# EAGLE board Smartglove_IMU_FIX_Connections (EAGLE 9.2.0)
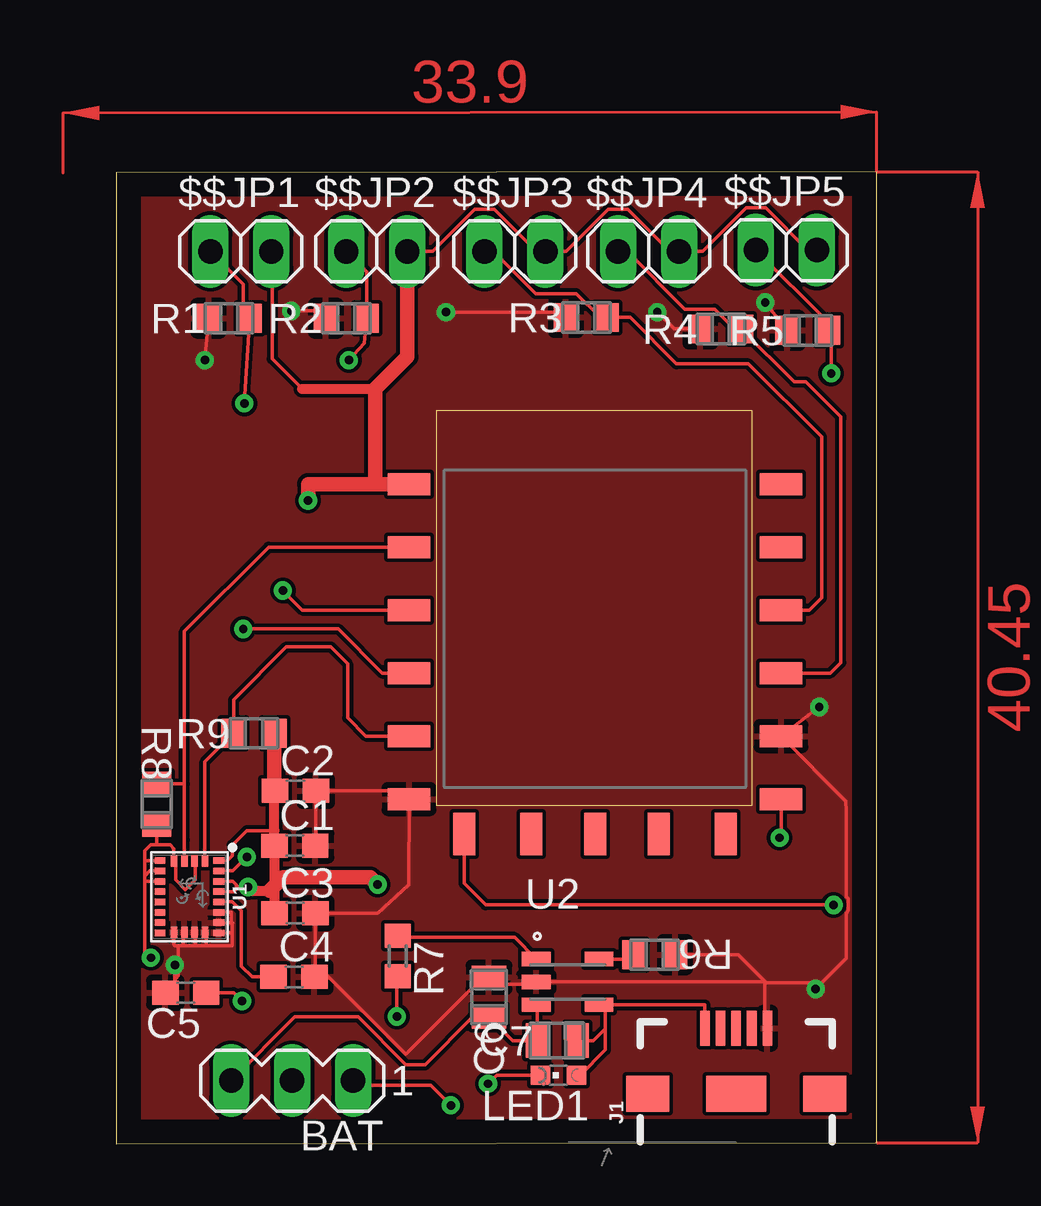
[diagram p0: board, top side]
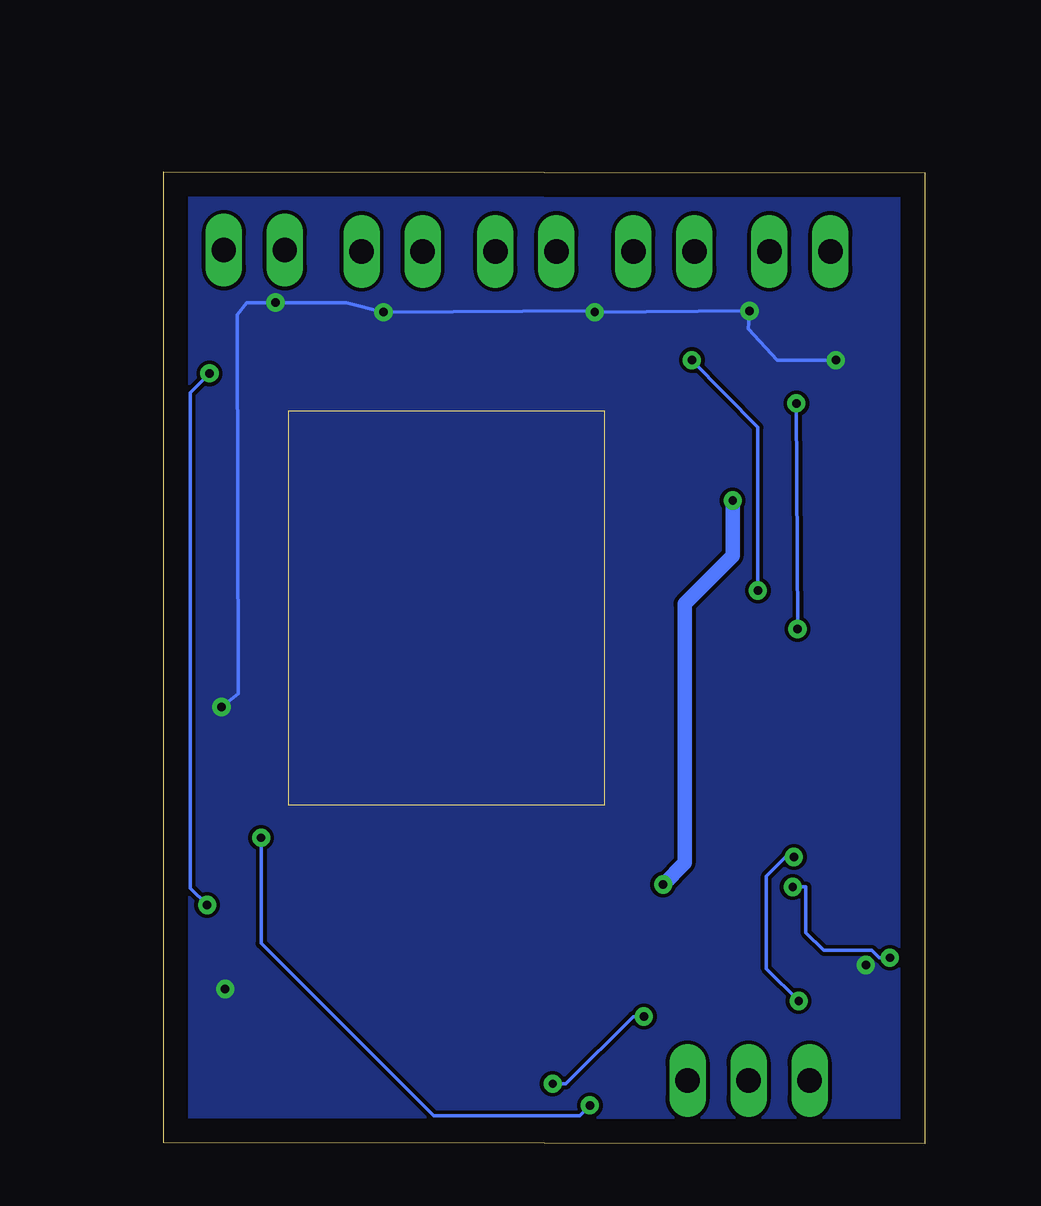
[diagram p1: board, bottom side, seen from below]

Size 31.7 x 40.5 mm. Coordinates in mm from the lower left corner, seen from the top.
Outline: 0,0 31.7,0.05 31.7,40.5 0,40.45 0,0
Copper layers (1*16): Top 0.035mm / dielectric 1.5mm / Bottom 0.035mm
Design rules "default": minimum track width 6mil, minimum drill 0.35mm, track to track 6mil, track to pad 6mil, pad to pad 6mil, via to via 6mil, smd to smd 6mil, copper to edge 40mil, drill to drill 6mil, minimum pad ring 10mil, minimum via ring 8mil, stop-mask expansion 4mil, vias tented up to drill 0mil, thermal gap 10mil
Milling: area 13.3,14.1 to 26.5,30.5

## Footprints (pad centres in the part's own frame; a part is rotated, then mirrored left to right if it is on the bottom)
1X02 = drill 1.016 long: 1 -1.27,0; 2 1.27,0
MA03-1 = drill 1.016 long: 1 -2.54,0; 2 0,0; 3 2.54,0
C0603 = smd 1.1 x 1: 1 -0.85,0; 2 0.85,0
YAG_CC0805 = smd 0.965 x 1.448: 1 -0.826,0; 2 0.826,0
USB-B-MICRO-SMD = smd 1.45 x 0.4: D+ 2.725,0; D- 2.725,0.65; GND 2.725,-1.3; ID 2.725,-0.65; VBUS 2.725,1.3 | smd 1.5 x 1.8: SHIELD1 0,3.685; SHIELD2 0,-3.685 | smd 1.5 x 2.5: SHIELD3 0,0
CHIPLED_0603 = smd 0.8 x 0.8: A 0,-0.75; C 0,0.75
RC0805N = smd 1.006 x 1.2: 1 -0.853,0; 2 0.853,0
R0603 = smd 1 x 1.1: 1 -0.85,0; 2 0.85,0
LGA-24-3.5X3 = smd 0.27 x 0.45: 1 -1.505,1.225; 6 -1.505,-1.225; 7 -1.075,-1.225; 8 -0.645,-1.225; 9 -0.215,-1.225; 10 0.215,-1.225; 11 0.645,-1.225; 12 1.075,-1.225; 13 1.505,-1.225; 18 1.505,1.225; 19 1.075,1.225; 20 0.645,1.225; 21 0.215,1.225; 22 -0.215,1.225; 23 -0.645,1.225; 24 -1.075,1.225 | smd 0.45 x 0.27: 2 -1.475,0.645; 3 -1.475,0.215; 4 -1.475,-0.215; 5 -1.475,-0.645; 14 1.475,-0.645; 15 1.475,-0.215; 16 1.475,0.215; 17 1.475,0.645
SOT23-5 = smd 1.2 x 0.6: 1 -1.306,0.95; 2 -1.306,0; 3 -1.306,-0.95; 4 1.306,-0.95; 5 1.306,0.95
BLE-NANO-PKG = smd 1.778 x 0.914: A3 7.75,4.375; A4 7.75,1.75; GND$6 -7.75,-3.5; GND$8 7.75,-0.875; RXD -7.75,1.75; SCL -7.75,-0.875; SDA -7.75,7; SWCLK 7.75,9.625; SWDIO 7.75,7; TXD -7.75,4.375; VDD -7.75,9.625; VIN 7.75,-3.5 | smd 0.914 x 1.778: P06 2.65,-4.95; P07 5.45,-4.95; P15 0,-4.95; P28 -5.45,-4.95; P29 -2.65,-4.95

## Placement (x,y rotation side)
$$JP1  [1X02]  5.2,37.18 0 top
$$JP2  [1X02]  10.87,37.18 0 top
$$JP3  [1X02]  16.62,37.18 0 top
$$JP4  [1X02]  22.19,37.18 0 top
$$JP5  [1X02]  27.94,37.24 0 top
BAT  [MA03-1]  7.34,2.63 180 top
C1  10u  [C0603]  7.45,12.42 0 top
C2  .1u  [C0603]  7.48,14.7 0 top
C3  .1u  [C0603]  7.46,9.61 0 top
C4  10n  [C0603]  7.42,6.95 0 top
C5  0.1u  [C0603]  2.91,6.3 180 top
C6  CC0805ZRY5V6BB475  [YAG_CC0805]  15.54,6.11 90 top
C7  CC0805ZRY5V6BB475  [YAG_CC0805]  18.38,4.3 0 top
J1  [USB-B-MICRO-SMD]  25.84,2.09 90 top
LED1  [CHIPLED_0603]  18.44,2.86 90 top
R1  ERJ-6GEYJ203V  [RC0805N]  4.71,34.4 0 top
R2  ERJ-6GEYJ203V  [RC0805N]  9.6,34.4 0 top
R3  ERJ-6GEYJ203V  [RC0805N]  19.6,34.43 0 top
R4  ERJ-6GEYJ203V  [RC0805N]  25.2,33.95 0 top
R5  ERJ-6GEYJ203V  [RC0805N]  28.83,33.89 0 top
R6  ERJ-6GEYJ203V  [RC0805N]  22.44,7.88 180 top
R7  [R0603]  11.74,7.82 270 top
R8  ERJ-6GEYJ203V  [RC0805N]  1.7,14.15 270 top
R9  ERJ-6GEYJ203V  [RC0805N]  5.75,17.1 0 top
U1  LSM9DS1  [LGA-24-3.5X3]  3.06,10.29 270 top
U2  MCP73832T-2ACI/OT  [SOT23-5]  18.82,6.74 0 top
U$1  BLE-NANO  [BLE-NANO-PKG]  19.96,17.86 0 top

## Library data of the parts
$$JP1-$$JP5 = pinhead
BAT = con-lstb; OC_FARNELL: unknown; OC_NEWARK: unknown
C1-C5 = rcl; SPICEPREFIX: C
C6 C7 = Yageo 4.7uF Cap; MANUFACTURER_PART_NUMBER: CC0805ZRY5V6BB475; VENDOR: Yageo
J1 = SparkFun-Connectors; PROD_ID: CONN-11752
LED1 = led
R1-R6 R8 R9 = Panasonic 20K Res; MANUFACTURER_PART_NUMBER: ERJ6GEYJ203V; VENDOR: Panasonic
R7 = rcl; SPICEPREFIX: R
U1 = SparkFun-Sensors; PROD_ID: IC-12536
U2 = MCP73832T-2ACI_OT; AVAILABILITY: Unavailable; MF: Microchip; MP: MCP73832T-2ACI-OT; PACKAGE: SOT-23-5 Microchip; PRICE: None
U$1 = BLE-NANO

## Nets
AN1: $$JP5.1 R5.2 U$1.P28
AN2: $$JP2.1 R2.2 U$1.TXD
AN3: $$JP1.1 R1.2 U$1.RXD
AN4: $$JP4.1 R4.2 U$1.A4
AN5: $$JP3.1 R3.2 U$1.A3
GND: C1.2 C2.2 C3.2 C4.2 C5.2 C6.2 J1.GND R1.1 R2.1 R3.1 R4.1 R5.1 R6.1 U1.14 U1.15 U1.16 U1.17 U1.18 U1.19 U1.20 U2.2 U$1.GND$6 U$1.GND$8
N$5: C5.1 U1.24
N$6: C4.1 U1.21
N$8: LED1.C R7.2
N$9: R7.1 U2.1
N$16: R6.2 U2.5
SCL: R9.1 U1.2 U$1.SCL
SDA: R8.1 U1.4 U$1.SDA
VBAT: BAT.3 C6.1 C7.1 U2.3
VBUS: C7.2 J1.VBUS LED1.A U2.4
VDD: $$JP1.2 $$JP2.2 $$JP3.2 $$JP4.2 $$JP5.2 C1.1 C2.1 C3.1 R8.2 R9.2 U1.1 U1.3 U1.5 U1.6 U1.7 U1.8 U1.22 U1.23 U$1.VDD
VIN: BAT.1 U$1.VIN

## Tracks (layer width: path | path; a pad name or v marks a point on that pad's centre or on a via)
AN1  (via drill 0.35 pad 0.55)
  Top 0.152: v29.9,9.95 15.4,9.95 14.5,10.85 14.51,10.86 U$1.P28 | $$JP5.1 29.68,34.22 R5.2 29.8,33.77 v29.8,32.1
  Bottom 0.152: v29.9,9.95 30.6,10.65 30.6,31.3 v29.8,32.1
AN2  (via drill 0.35, 0.35 pad 0.55)
  Top 0.152: v6.95,23.05 7.77,22.23 U$1.TXD | v9.7,32.65 10.35,33.35 R2.2 10.45,36.32 $$JP2.1
  Bottom 0.152: v6.95,23.05 6.95,29.85 v9.7,32.65
AN3  (via drill 0.35 pad 0.55)
  Top 0.152: v5.3,21.45 9.25,21.45 11.09,19.61 U$1.RXD | $$JP1.1 5.3,35.81 5.3,34.66 R1.2 v5.35,30.85
  Bottom 0.152: v5.35,30.85 v5.3,21.45
AN4
  Top 0.152: U$1.A4 29.76,19.61 30.2,20.05 30.2,30.22 30.2,30.3 28.75,31.75 | 28.75,31.75 | R4.2 26.08,33.93 | 26.08,33.93 28.25,31.75 28.75,31.75 | $$JP4.1 21.3,37.18 23.7,34.78 24.95,34.78 25.8,33.93 26.08,33.93
AN5
  Top 0.152: U$1.A3 28.89,22.23 29.4,22.75 29.4,29.45 26.35,32.5 23.35,32.5 21.42,34.43 R3.2 20.17,34.43 19.18,35.43 17.48,35.43 15.73,37.18 $$JP3.1
GND  (via drill 0.35 pad 0.55)
  Top 0.152: U1.17 3.75,8.77 3.75,8.25 | U1.14 2.42,8.28 2.45,8.25 2.6,8.25 | 2.6,8.25 2.8,8.25 | 2.8,8.25 2.8,8.77 U1.15 | 2.8,8.25 3.3,8.25 | 3.75,8.25 3.3,8.25 | U1.16 3.3,8.79 3.3,8.25 | 3.75,8.25 4.85,8.25 4.85,8.8 | 4.85,8.8 4.84,8.78 U1.18 | U1.19 4.87,9.21 4.8,9.27 4.8,9.64 U1.20 | 4.85,9.2 4.85,8.8 | U$1.GND$6 | 27.04,6.7 27.04,4.91 J1.GND | 27.04,6.7 27,6.74 U2.2 17.41,6.64 15.84,6.64 C6.2 15.29,6.94 12.08,3.72 8.81,6.99 8.31,6.99 | 27.04,6.7 27.1,6.7 | 27.1,6.7 28.9,6.7 v29.15,6.45 30.42,7.72 30.42,9.61 30.51,9.7 30.51,10.2 30.42,10.29 30.42,13.85 30.42,14.28 U$1.GND$8 v29.3,18.2 | R6.1 25.92,7.88 27.1,6.7 | C1.2 8.33,12.45 C2.2 11.87,14.7 U$1.GND$6 | 8.31,6.99 C3.2 10.9,9.6 12.2,10.8 U$1.GND$6 | 8.31,6.99 C4.2 | R4.1 23.25,33.95 v22.55,34.65 | v13.75,34.65 18.53,34.65 R3.1 | v7.3,34.7 8.45,34.7 R2.1 | R5.1 v27.05,35.05 | 2.6,8.25 2.6,7 C5.2 2.45,6.69 v2.45,7.45 | R1.1 v3.7,32.65
  Bottom 0.152: v29.3,18.2 28.6,18.75 28.65,34.55 28.25,35.05 v27.05,35.05 24.1,35.05 v22.55,34.65 13.86,34.7 v13.75,34.65 v7.3,34.7 7.35,33.95 6.15,32.65 v3.7,32.65
  pour Top: -3.75,41.65 37,41.65 37.1,-1.1 -4.9,-1.1 -4.85,41.6
  pour Bottom: -4.85,41.65 35.65,41.65 35.6,-0.5 -4.85,-0.6 -4.95,41.65
N$5  (via drill 0.35 pad 0.55)
  Top 0.152: C5.1 4.9,6.3 v5.25,5.95 | v5.45,11.95 4.87,11.36 U1.24
  Bottom 0.152: v5.25,5.95 6.6,7.3 6.6,11.15 5.8,11.95 v5.45,11.95
N$6
  Top 0.152: U1.21 4.85,10.07 5.22,9.7 5.22,7.4 5.67,6.95 C4.1
N$8  (via drill 0.35 pad 0.55)
  Top 0.152: LED1.C 15.86,2.86 v15.5,2.5 | v11.7,5.3 11.7,6.93 R7.2
  Bottom 0.152: v15.5,2.5 14.95,2.5 12.15,5.3 v11.7,5.3
N$9
  Top 0.152: U2.1 16.6,8.6 11.81,8.6 R7.1
N$16
  Top 0.152: 20.19,7.75 U2.5 21.4,7.69 R6.2
SCL
  Top 0.152: U1.2 3.71,15.91 R9.1 4.9,18.5 7.1,20.7 8.95,20.7 9.65,20 9.65,17.75 10.42,16.98 U$1.SCL
SDA
  Top 0.152: U1.4 2.85,12.65 2.85,15 | U$1.SDA 6.36,24.86 2.85,21.34 2.85,15 | R8.1 2.85,15
VBAT
  Top 0.152: BAT.3 7.46,5.28 10.08,5.28 12.08,3.29 12.88,3.29 14.87,5.28 C6.1 16.53,4.3 C7.1 17.55,5.75 U2.3
VBUS
  Top 0.152: J1.VBUS 24.54,5.79 U2.4 20.39,5.53 20.39,4.8 | 20.39,4.8 20.39,3.91 19.34,2.86 LED1.A | C7.2 19.89,4.3 20.39,4.8
VDD  (via drill 0.35, 0.35 pad 0.55)
  Top 0.152: 1.84,11.75 U1.6 1.21,11.79 | U1.22 4.9,10.5 5,10.6 5,10.7 | U1.23 4.87,10.93 5,10.8 5,10.7 | 5,10.7 5.45,10.7 5.5,10.65 | 5.6,10.55 5.55,10.6 5.5,10.65 | 6.6,13.05 5.45,13.05 4.84,12.44 4.84,12 4.64,11.79 U1.1 | U1.7 1.42,11.36 1.21,11.15 | 1.2,10.95 1.2,11.15 1.21,11.15 | 1.2,10.95 1.2,8 v1.45,7.75 | U1.8 1.22,10.93 1.2,10.95 | 1.21,11.79 1.21,11.15 | 1.7,12.45 2.25,12.45 2.42,12.28 U1.5 2.48,11.7 2.48,10.99 2.9,10.58 3.31,10.99 3.31,11.73 U1.3 | 1.7,12.45 1.45,12.45 1.21,12.2 1.21,11.79 | 6.8,17.3 R9.2 | 6.6,14.73 C2.1 | $$JP1.2 6.5,37.15 6.5,32.7 7.75,31.45 | $$JP2.2 13.19,37.18 14.94,38.93 15.76,38.93 17.51,37.18 $$JP3.2 18.76,37.18 20.51,38.93 21.33,38.93 23.08,37.18 $$JP4.2 24.45,37.18 26.26,38.99 27.08,38.99 28.83,37.24 $$JP5.2 | R8.2 1.7,12.45 | v5.5,10.7 5.5,10.65
  Top 0.406: C3.1 6.61,10.55 | 6.61,10.55 C1.1 6.6,13.05 6.6,14.67 C2.1 | 5.6,10.55 6.41,10.55 6.61,10.55 | 7.75,31.45 10.8,31.45
  Top 0.61: U$1.VDD 10.8,27.48 | 10.8,27.48 8,27.48 v8,26.8 | R9.2 6.6,14.73 | 6.41,10.55 6.96,11.1 10.6,11.1 v10.9,10.8 | 10.8,27.48 10.8,31.45 12.14,32.79 $$JP2.2
  Bottom 0.152: v5.5,10.7 4.95,10.7 4.95,8.8 4.21,8.06 2.2,8.06 1.89,7.75 v1.45,7.75
  Bottom 0.61: v8,26.8 8,24.5 10,22.5 10,11.7 v10.9,10.8
VIN  (via drill 0.35, 0.35 pad 0.55)
  Top 0.152: U$1.VIN arc-90 U$1.VIN 27.71,12.81 v27.65,12.75 | v13.95,1.6 13.12,2.43 10.08,2.43 BAT.1
  Bottom 0.152: v27.65,12.75 27.65,8.35 20.46,1.16 20.45,1.16 14.38,1.17 v13.95,1.6
(copper drawn outside any net)
  shapes: Top area x2